# Altium PCB PCB_v1.PcbDoc
Units mm, origin at the board's own origin, x right, y up, seen from the top; angles counter-clockwise.
Board outline 35 x 35 mm, 4 copper layers (Top Layer, Signal Layer 1, Signal Layer 2, Bottom Layer), stack 1.09 mm thick; 73 components, 83 nets, 323 pads, 394 vias.
Unrouted connection lines stored in the file: 8.
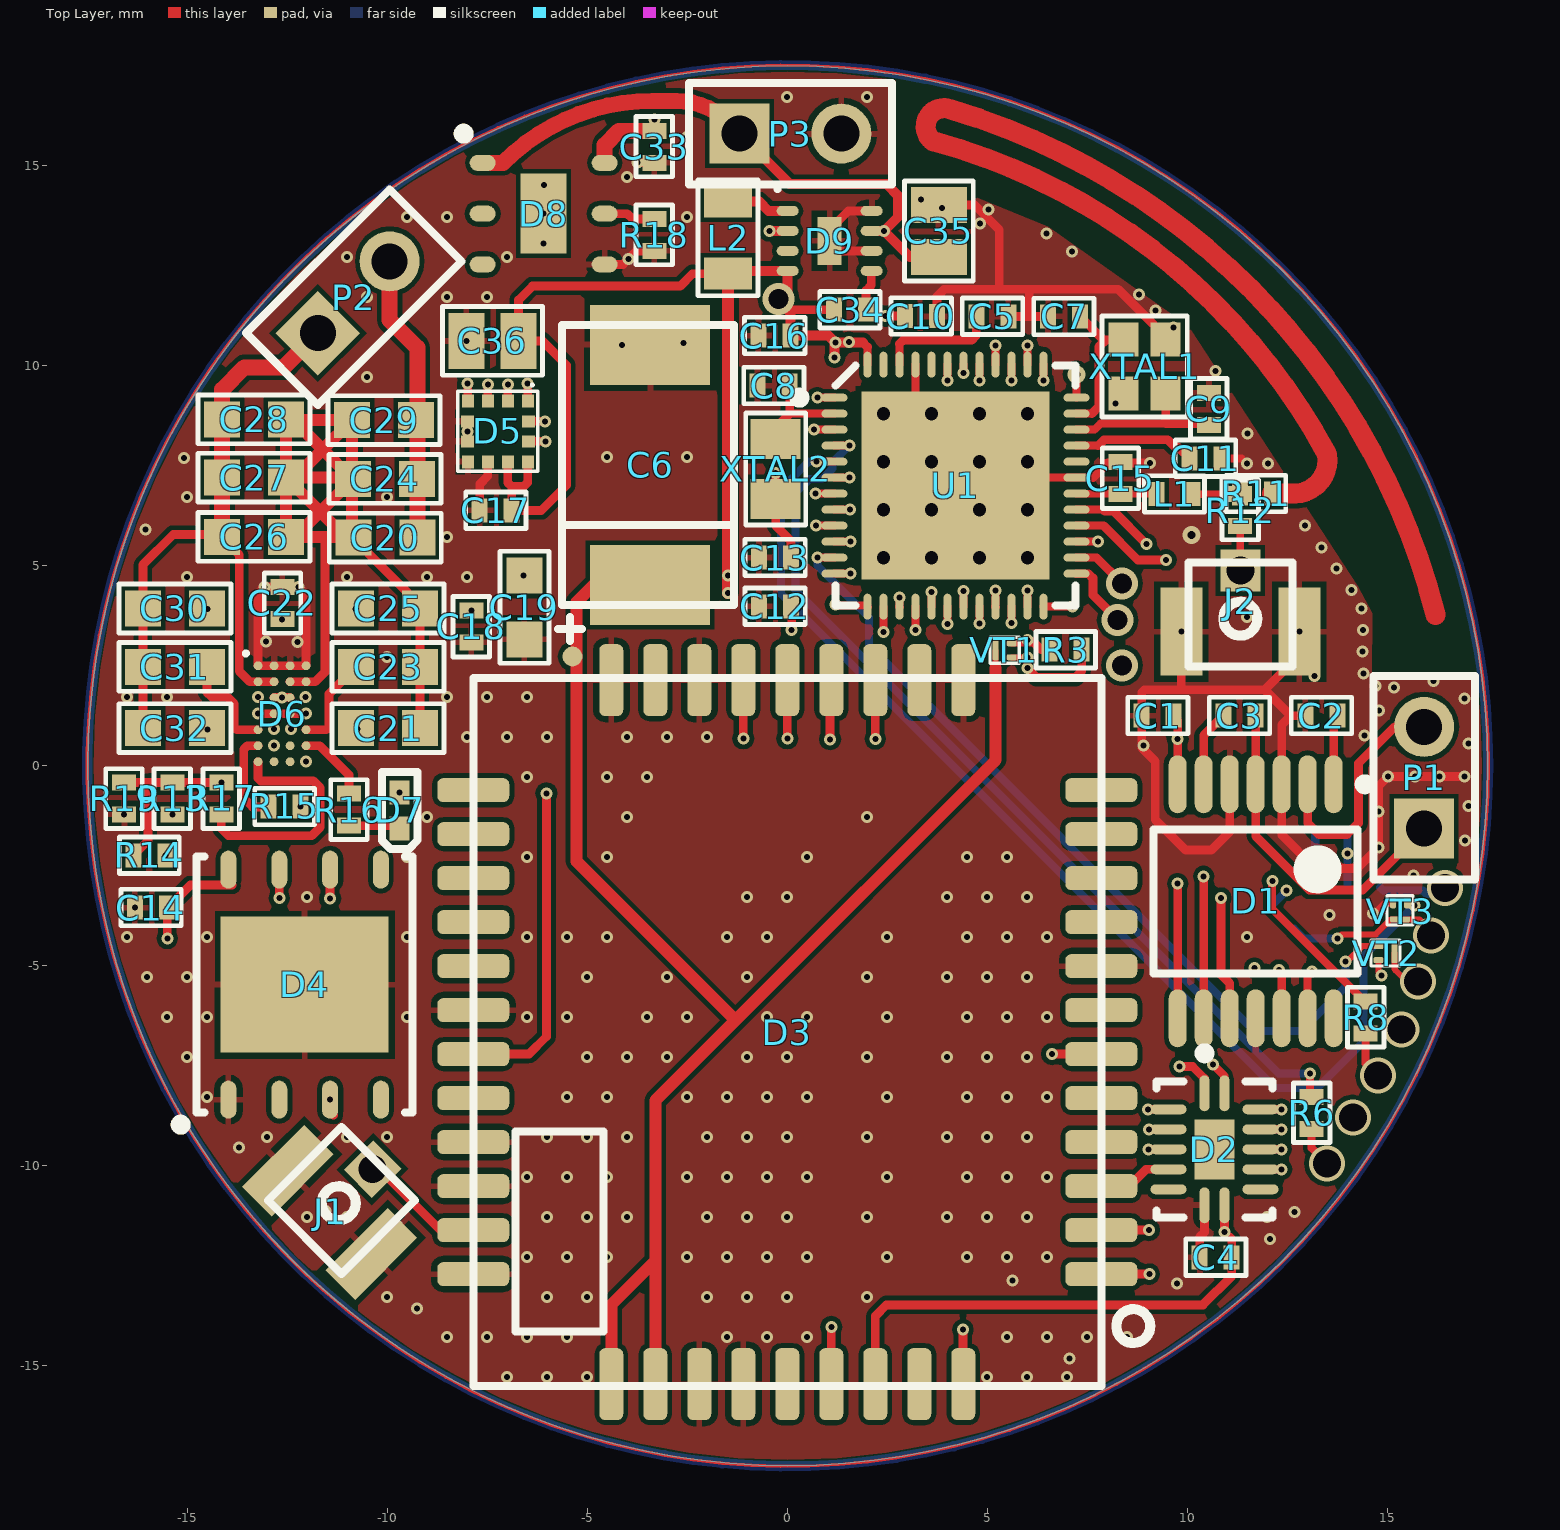
[diagram p0: Top Layer view]
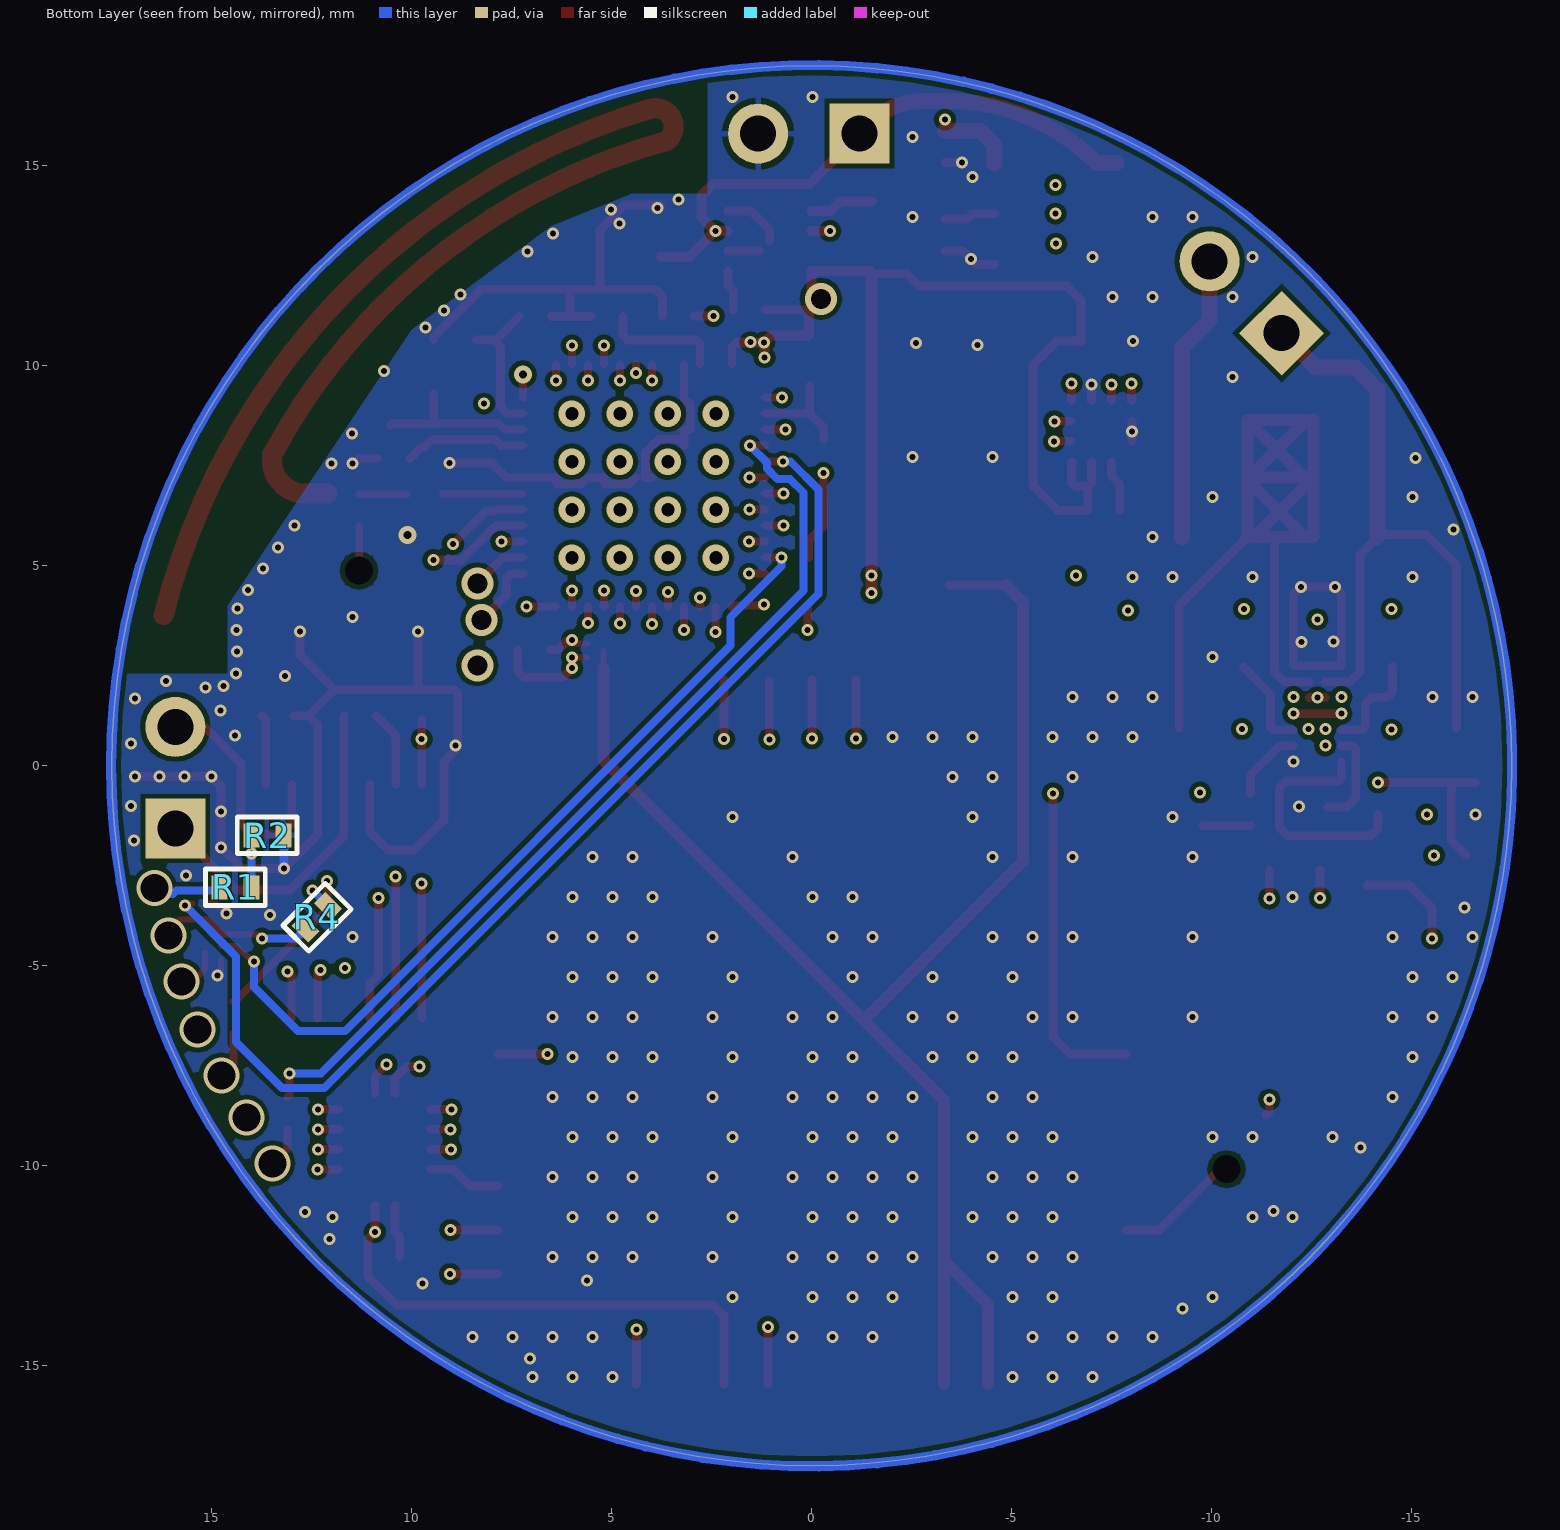
[diagram p1: Bottom Layer view, seen from below]
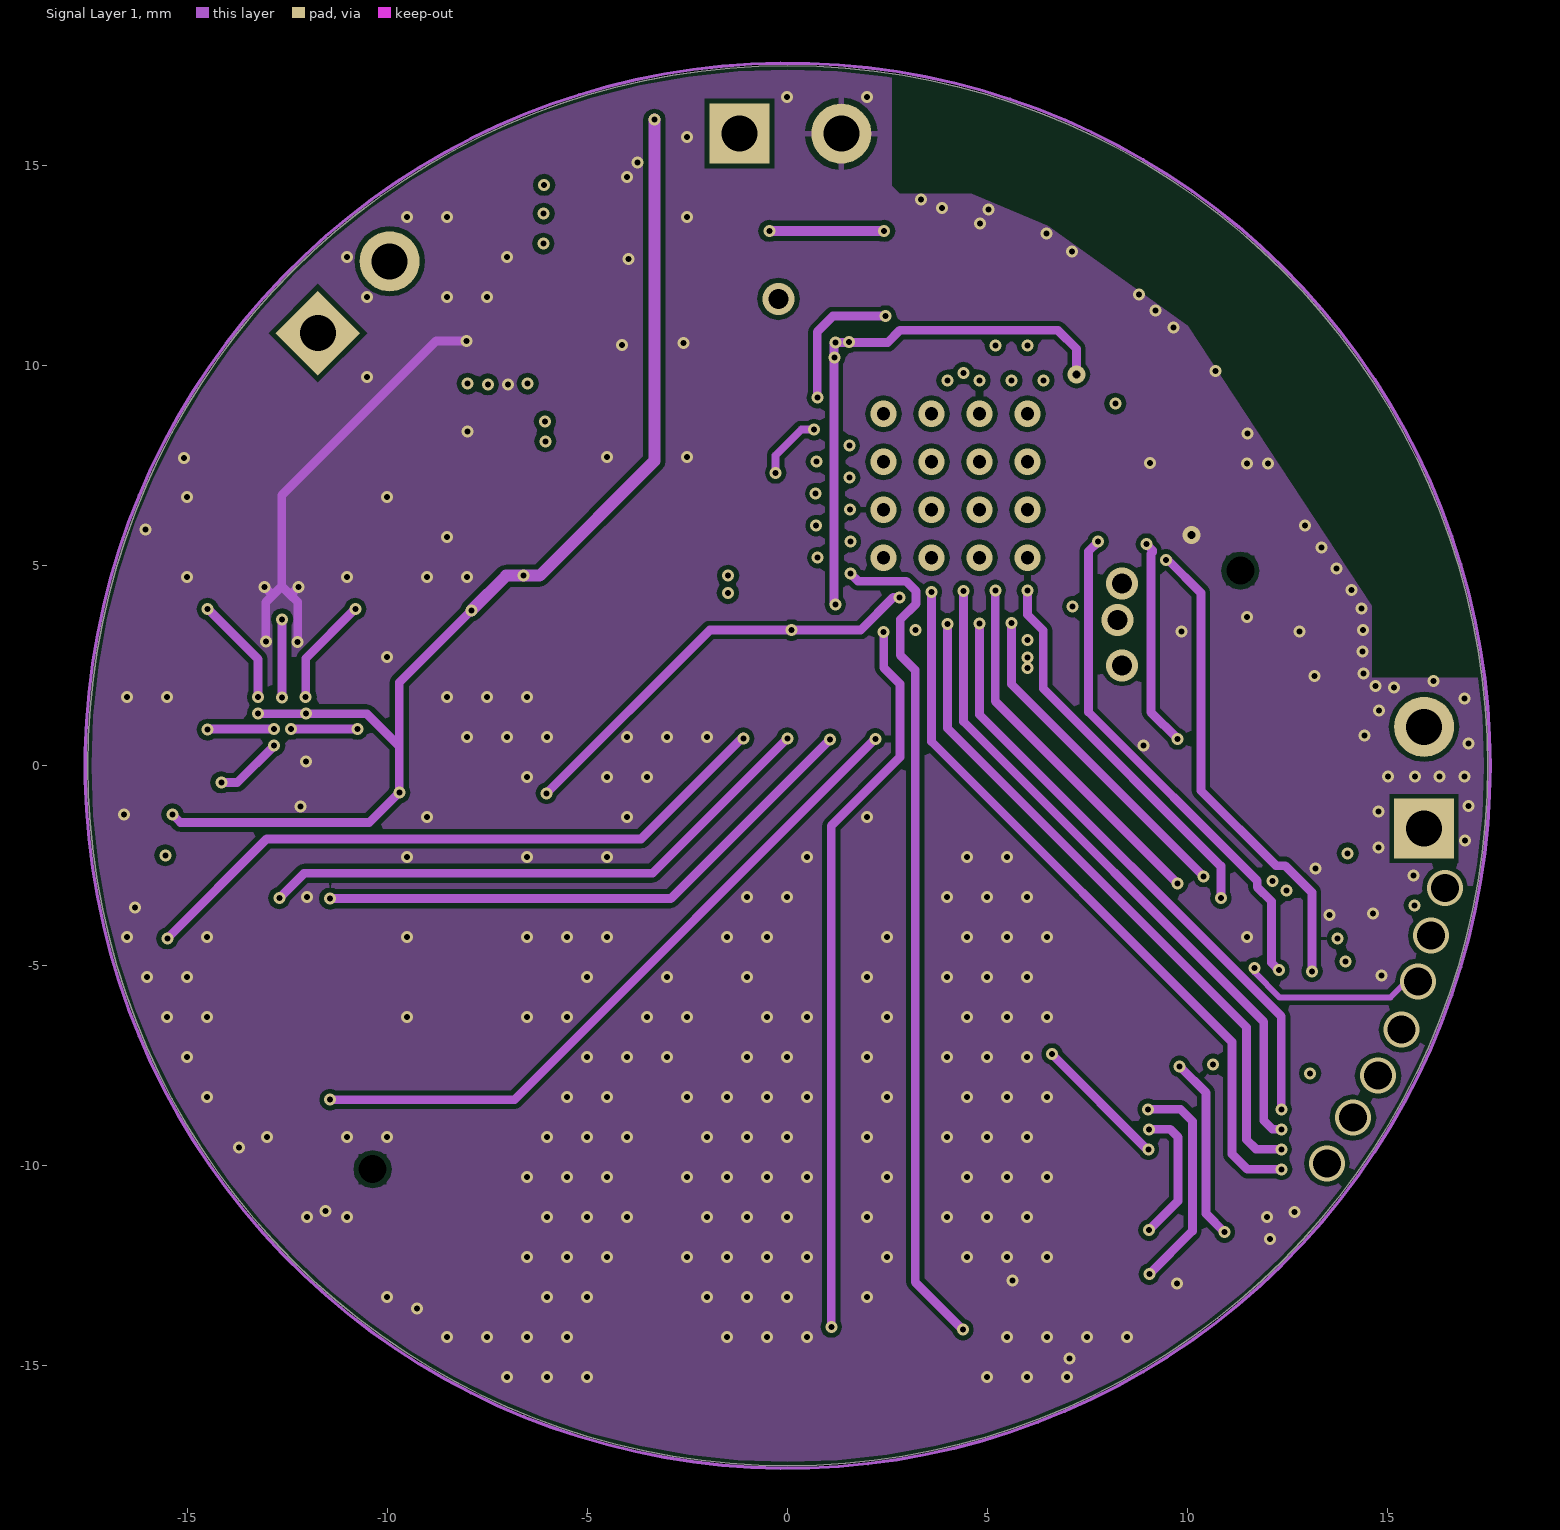
[diagram p2: Signal Layer 1]
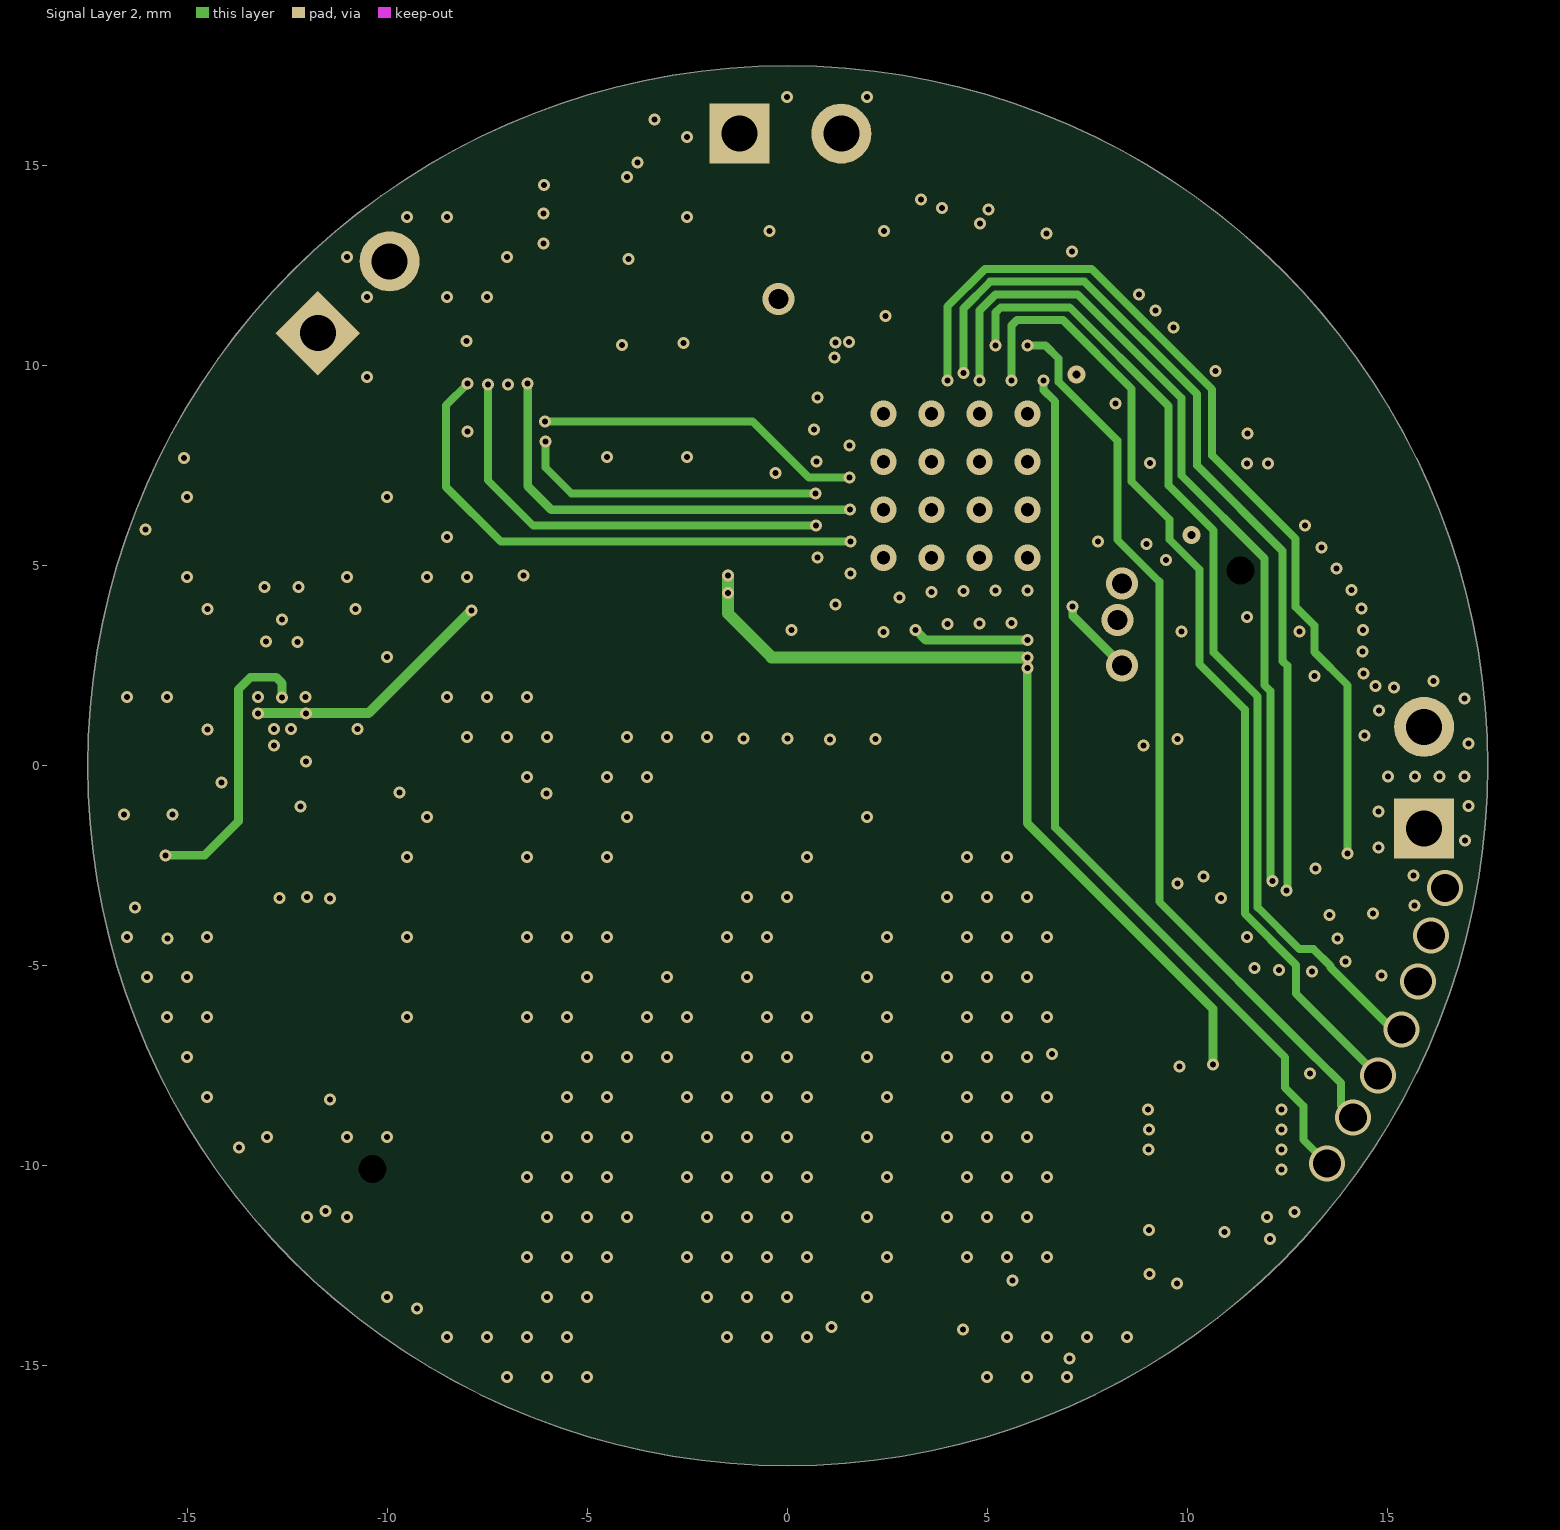
[diagram p3: Signal Layer 2]

## Layer stack, top to bottom
Top Solder: solder mask 0.0102, Solder Resist, Dk 3.5
Top Layer: signal copper 0.035
Dielectric 1: core 0.11, FR-4, Dk 4.2
Signal Layer 1: signal copper 0.035
Dielectric 3: prepreg 0.73, Dk 4.2
Signal Layer 2: signal copper 0.035
Dielectric 2: core 0.11, Dk 4.2
Bottom Layer: signal copper 0.035
Bottom Solder: solder mask 0.0102, Solder Resist, Dk 3.5

## Board outline
0,-17.5 cw(c0,0) -17.5,0 cw(c0,0) 0,17.5 cw(c0,0) 17.5,0 cw(c0,0)

## Design rules (kind name [scope] priority, off if disabled: settings)
Clearance [All] p1: gap=0.12 ignorepadtopadclearanceinfootprint=FALSE except(0: Arc-Hole Track-Hole SMDPad-Hole THPad-Hole Via-Hole Fill-Hole Poly-Hole Region-Hole Text-Hole)
PolygonConnect [(ObjectKind = 'Via') And (Net = 'GND')] p1: connectstyle=Direct reliefconductorwidth=0.254 reliefentries=4 polygonreliefangle="90 Angle" airgapwidth=0.254
PolygonConnect PolygonConnect_1 [All] p2: connectstyle=Relief reliefconductorwidth=0.15 reliefentries=4 polygonreliefangle="90 Angle" airgapwidth=0.15
RoutingVias [All] p1: holewidth=0.15 width=0.3 viastyle="Through Hole" minholewidth=0.15 minwidth=0.3 maxholewidth=0.15 maxwidth=0.3
SolderMaskExpansion [All] p1: expansion=0.102
Width [All] p1: maxlimit=0.5 minlimit=0.08 preferedwidth=0.2
30 further rules are at their usual default settings.

## Components (designator, comment, footprint, x,y, rotation, side; value= is the part's Value field where it differs from the comment)
C1 "100n" C0402 9.25,1.25 r0 top
C2 "100n" C0402 13.34,1.25 r0 top
C3 "C" C0402 11.29,1.25 r0 top
C4 "100n" C0402 10.7,-12.29 r0 top
C5 "1u" C0402 5.116,11.23 r0 top
C6 "C_TANTAL" C_TYPE_D -3.44,7.52 r90 top
C7 "12p" C0402 6.91,11.23 r180 top
C8 "12p" C0402 -0.35,9.5 r0 top
C9 "12p" C0402 10.53,8.92 r90 top
C10 "100n" C0402 3.332,11.24 r0 top
C11 "100p" C0402 10.44,7.68 r0 top
C12 "100n" C0402 -0.32,3.985 r0 top
C13 "12p" C0402 -0.32,5.2 r0 top
C14 "100n" C0402 -15.92,-3.55 r0 top
C15 "0.8p" C0402 8.32,7.19 r270 top
C16 "100n" C0402 -0.33,10.75 r0 top
C17 "100n" C0402 -7.3,6.38 r0 top
C18 "100n" C0402 -7.91,3.48 r270 top
C19 "10u" C0603 -6.58,3.96 r90 top
C20 "NF" C0603 -10.06,5.7 r0 top
C21 "47n" C0603 -9.99,0.94 r180 top
C22 "10u" C0402 -12.63,4.07 r270 top
C23 "47n" C0603 -9.99,2.47 r180 top
C24 "NF" C0603 -10.07,7.17 r0 top
C25 "10n" C0603 -9.99,3.93 r180 top
C26 "NF" C0603 -13.34,5.72 r0 top
C27 "NF" C0603 -13.34,7.2 r0 top
C28 "NF" C0603 -13.34,8.66 r0 top
C29 "NF" C0603 -10.09,8.64 r0 top
C30 "10n" C0603 -15.32,3.93 r0 top
C31 "47n" C0603 -15.32,2.47 r0 top
C32 "47n" C0603 -15.32,0.94 r0 top
C33 "C" C0402 -3.33,15.47 r90 top
C34 "560p" C0402 1.56,11.4 r180 top
C35 "4.7u" C0805 3.78,14.02 r270 top
C36 "4.7u" C0805 -8.03,10.62 r0 top
D1 "ZSSC3122" TSSOP14 11.7,-3.39 r270 top
D2 "NTS0104BQ-Q100X" DHVQFN14 10.67,-9.59 r0 top
D3 "SIM7020E" SIM7020E 7.84,-12.71 r180 top
D4 "eSim" VQFN8 -12.075,-5.475 r0 top
D5 "IIS2DH" LGA12 -6.498,9.122 r270 top
D6 "BQ51003" DSBGA -12.64,1.3 r0 top
D7 "Led" D0402(1006) -9.7,-1.57 r90 top
D8 "STBC08" DFN6 -6.1,13.8 r0 top
D9 "MIC23050-SYML" MLF8 1.05,13.12 r0 top
J1 "Connector(U.FL)" U.FL -10.375,-10.089 r315 top
J2 "Connector(U.FL)" U.FL 11.315,4.875 r0 top
L1 "3.9n" L0402 9.62,6.79 r0 top
L2 "lqm21pn1r0mc0d" L0805 -1.49,14.1 r270 top
P1 "C" HDR1X2 15.91,-1.57 r90 top
P2 "COIL" HDR1X2 -11.746,10.814 r45 top
P3 "BAT" HDR1X2 -1.2,15.8 r0 top
R1 "R" R0402 14.41,-3.04 r0 bottom
R2 "R" R0402 13.61,-1.74 r180 bottom
R3 "100k" R0402 6.95,2.9 r180 top
R4 "R" R0402 12.37,-3.79 r315 bottom
R6 "R" R0402 13.1,-8.68 r270 top
R8 "R" R0402 14.45,-6.29 r270 top
R11 "0" R0402 11.71,6.8 r0 top
R12 "0" R0402 11.31,6.39 r270 top
R13 "NF" R0402 -15.38,-0.82 r90 top
R14 "20k" R0402 -15.96,-2.24 r180 top
R15 "10k" R0402 -12.58,-1.02 r180 top
R16 "620" R0402 -10.97,-1.1 r270 top
R17 "620" R0402 -14.16,-0.82 r90 top
R18 "20k" R0402 -3.33,13.27 r90 top
R19 "R" R0402 -16.59,-0.82 r90 top
U1 "nRF52811-QFAA" QFN40P600X600X90-48N 4.195,7 r0 top
VT1 "CSD23280F3" CSD13380F3#1 5.6,2.71 r180 top
VT2 "CSD13380F3" CSD13380F3#2 14.77,-4.51 r0 top
VT3 "CSD13380F3" CSD13380F3#2 15.485,-3.44 r270 top
XTAL1 "XTAL" NX2016SA 8.4,9.3 r90 top
XTAL2 "32.768 kHz" NX2012SA -0.3,6.67 r90 top

## Footprints (in the part's own frame and the unit in brackets; to place one, negate y for a bottom-side part, rotate by r counter-clockwise, add the part's x,y. Pads: shape width x height; smd on the part's side, far side on the other; paste and mask are expansions set on the pad)
C0402 [mm]
  rect 0.4x0.6 smd: 1(-0.4,0) 2(0.4,0)
  silkscreen extent -0.75,-0.45 0.76,0.46
C0603 [mm]
  rect 0.9x0.9 smd: 1(-0.8,0) 2(0.8,0)
  silkscreen extent -1.4,-0.61 1.4,0.61
C0805 [mm]
  rect 0.9x1.4 smd: 1(0,0) 2(1.3,0)
  silkscreen extent -0.6,-0.86 1.9,0.86
C_TYPE_D [mm]
  rect 2x3 smd: 1(-3,0) 2(3,0)
  silkscreen extent -4.4,-2.1 3.5,2.3
CSD13380F3#1 [mm]
  rrect50% 0.15x0.5 smd: D(0.4,-0.175)
  rrect50% 0.25x0.15 smd: G(0,-0.35) S(0,0)
  silkscreen extent -0.19,-0.5 0.54,0.15
CSD13380F3#2 [mm]
  rrect50% 0.15x0.5 smd: D(0.4,-0.175)
  rrect50% 0.25x0.15 smd: G(0,0) S(0,-0.35)
  silkscreen extent -0.19,-0.5 0.54,0.15
D0402(1006) [mm]
  rect 0.6x0.5 smd: 1(0,0) 2(0.9,0)
  silkscreen extent -0.51,-0.45 1.41,0.44
DFN6 [mm]
  oval 0.65x0.4 smd: 1(-1.525,1.27) 2(-1.525,0) 3(-1.525,-1.27) 4(1.525,-1.27) 5(1.525,0) 6(1.525,1.27)
  rect 1.15x2 smd: 7(0,0)
  silkscreen extent -2.12,1.88 -1.88,2.12, body extent -1.55,-1.55 1.55,1.55, height 1
DHVQFN14 [mm] "QFN, 14-Leads, Body 2,50x3,00mm, Pitch 0,50mm, Thermal Pad 1,00x1,50mm, IPC Medium Density"
  oval 0.25x0.9 smd: 1(-0.25,1.4) 7(-0.25,-1.4) 8(0.25,-1.4) 14(0.25,1.4)
  oval 0.9x0.25 smd: 2(-1.15,1) 3(-1.15,0.5) 4(-1.15,0) 5(-1.15,-0.5) 6(-1.15,-1) 9(1.15,-1) 10(1.15,-0.5) 11(1.15,0) 12(1.15,0.5) 13(1.15,1)
  rect 1x1.5 smd: 15(0,0)
  silkscreen extent -1.45,-1.7 1.45,2.52, body extent -1.3,-1.55 1.3,1.55, height 1
DSBGA [mm] "DSBGA"
  round 0.22 smd: AC1(0.2,0.8) AC1(0.6,0.8) AC2(-0.6,0.8) AC2(-0.2,0.8) AD(0.6,-1.2) AD-EN(0.2,-0.8) BOOT1(0.6,0.4) BOOT2(-0.6,0.4) CHG(0.6,-0.8) CLAMP1(0.2,-0.4) CLAMP2(-0.2,-0.4) COMM1(0.6,-0.4) COMM2(-0.6,-0.4) EN1(0.2,-1.2) EN2(-0.2,-1.2) FOD(-0.2,-0.8) ILIM(-0.6,-1.2) OUT(-0.6,0) OUT(-0.2,0) OUT(0.2,0) OUT(0.6,0) PGND(-0.6,1.2) PGND(-0.2,1.2) PGND(0.2,1.2) PGND(0.6,1.2) RECT(-0.2,0.4) RECT(0.2,0.4) TS-CTRL(-0.6,-0.8)
  silkscreen extent -0.95,1.46 -0.85,1.55, body extent -0.8,-1.4 0.8,1.4, height 0.3
HDR1X2 [mm] "Connector; Header; 2 Position"
  rect 1.5x1.5 hole 0.9: 1(0,0)
  round 1.5 hole 0.9: 2(2.54,0)
  silkscreen extent -1.27,-1.27 3.81,1.27
L0402 [mm]
  rect 0.4x0.6 smd: 1(-0.4,0) 2(0.5,0)
  silkscreen extent -0.7,-0.45 0.8,0.46
L0805 [mm]
  rect 0.8x1.2 smd: 1(0,0) 2(1.8,0)
  silkscreen extent -0.55,-0.75 2.35,0.75
LGA12 [mm]
  rect 0.325x0.3 smd: 1(0,0) 2(0,-0.5) 3(0,-1) 4(0,-1.5) 7(1.525,-1.5) 8(1.525,-1) 9(1.525,-0.5) 10(1.525,0)
  rect 0.3x0.325 smd: 5(0.513,-1.512) 6(1.012,-1.512) 11(1.012,0.012) 12(0.513,0.012)
  silkscreen extent -0.41,-1.75 1.76,0.25
MLF8 [mm]
  oval 0.55x0.25 smd: 1(-1.05,0.75) 2(-1.05,0.25) 3(-1.05,-0.25) 4(-1.05,-0.75) 5(1.05,-0.75) 6(1.05,-0.25) 7(1.05,0.25) 8(1.05,0.75)
  rect 0.6x1.2 smd: 9(0,0)
  silkscreen extent -1.35,1.25 -1.25,1.35, body extent -1,-1 1,1, height 0.85
NX2012SA [mm]
  rect 1x1.25 smd: 1(0,0) 2(1.5,0)
  silkscreen extent -0.65,-0.75 2.15,0.75
NX2016SA [mm]
  rect 0.85x0.75 smd: 1(0,-1.05) 2(1.35,0) GND(0,0) GND(1.35,-1.05)
  silkscreen extent -0.58,-1.59 1.94,0.54
QFN40P600X600X90-48N [mm]
  oval 0.65x0.2 smd: 1(-3.025,2.2) 2(-3.025,1.8) 3(-3.025,1.4) 4(-3.025,1) 5(-3.025,0.6) 6(-3.025,0.2) 7(-3.025,-0.2) 8(-3.025,-0.6) 9(-3.025,-1) 10(-3.025,-1.4) 11(-3.025,-1.8) 12(-3.025,-2.2) 25(3.025,-2.2) 26(3.025,-1.8) 27(3.025,-1.4) 28(3.025,-1) 29(3.025,-0.6) 30(3.025,-0.2) 31(3.025,0.2) 32(3.025,0.6) 33(3.025,1) 34(3.025,1.4) 35(3.025,1.8) 36(3.025,2.2)
  oval 0.2x0.65 smd: 13(-2.2,-3.025) 14(-1.8,-3.025) 15(-1.4,-3.025) 16(-1,-3.025) 17(-0.6,-3.025) 18(-0.2,-3.025) 19(0.2,-3.025) 20(0.6,-3.025) 21(1,-3.025) 22(1.4,-3.025) 23(1.8,-3.025) 24(2.2,-3.025) 37(2.2,3.025) 38(1.8,3.025) 39(1.4,3.025) 40(1,3.025) 41(0.6,3.025) 42(0.2,3.025) 43(-0.2,3.025) 44(-0.6,3.025) 45(-1,3.025) 46(-1.4,3.025) 47(-1.8,3.025) 48(-2.2,3.025)
  rect 4.7x4.7 smd: 49(0,0)
  silkscreen extent -4.02,-3 3,3, body extent -3.02,-3.02 3.02,3.02, height 0.86
R0402 [mm]
  rect 0.4x0.6 smd: 1(-0.4,0) 2(0.4,0)
  silkscreen extent -0.75,-0.45 0.74,0.46
SIM7020E [mm]
  rrect50% 1.8x0.6 smd: 1(0,0) 2(0,-1.1) 3(0,-2.2) 4(0,-3.3) 5(0,-4.4) 6(0,-5.5) 7(0,-6.6) 8(0,-7.7) 9(0,-8.8) 10(0,-9.9) 11(0,-11) 12(0,-12.1) 22(15.7,-12.1) 23(15.7,-11) 24(15.7,-9.9) 25(15.7,-8.8) 26(15.7,-7.7) 27(15.7,-6.6) 28(15.7,-5.5) 29(15.7,-4.4) 30(15.7,-3.3) 31(15.7,-2.2) 32(15.7,-1.1) 33(15.7,0)
  rrect50% 0.6x1.8 smd: 13(3.45,-14.85) 14(4.55,-14.85) 15(5.65,-14.85) 16(6.75,-14.85) 17(7.85,-14.85) 18(8.95,-14.85) 19(10.05,-14.85) 20(11.15,-14.85) 21(12.25,-14.85) 34(12.25,2.75) 35(11.15,2.75) 36(10.05,2.75) 37(8.95,2.75) 38(7.85,2.75) 39(6.75,2.75) 40(5.65,2.75) 41(4.55,2.75) 42(3.45,2.75)
  silkscreen extent -1.22,-14.9 15.7,2.8
TSSOP14 [mm] "TSSOP14"
  oval 1.45x0.45 smd: 1(-2.925,1.95) 2(-2.925,1.3) 3(-2.925,0.65) 4(-2.925,0) 5(-2.925,-0.65) 6(-2.925,-1.3) 7(-2.925,-1.95) 8(2.925,-1.95) 9(2.925,-1.3) 10(2.925,-0.65) 11(2.925,0) 12(2.925,0.65) 13(2.925,1.3) 14(2.925,1.95)
  silkscreen extent -3.05,-2.55 1.8,2.85, body extent -2.2,-2.55 2.2,2.55, height 1.1
U.FL [mm]
  rect 1x1.05 smd: 1(0,0)
  rect 1.05x2.2 smd: 2(-1.475,-1.525) 2(1.475,-1.525)
  silkscreen extent -1.3,-2.4 1.3,0.2
VQFN8 [mm] "VQFN8"
  oval 0.4x0.95 smd: 1(-1.905,-2.875) 2(-0.635,-2.875) 3(0.635,-2.875) 4(1.905,-2.875) 5(1.905,2.875) 6(0.635,2.875) 7(-0.635,2.875) 8(-1.905,2.875)
  rect 4.2x3.4 smd: 9(0,0)
  silkscreen extent -3.22,-3.62 2.7,3.2, body extent -2.55,-3.05 2.55,3.05, height 0.9

## Part data
C1 C2 C4 C5 C7 C8 C9 C10 C11 C12 C13 C14 C15 C16 C17 C18 C19 C20 C21 C22 C23 C24 C25 C26 C27 C28 C29 C30 C31 C32 C34 C35 C36: library part C
D2: library part NTS0304
L1 L2: library part L
P1 P2 P3: library part "Header 2", "Header, 2-Pin"
R3 R11 R12 R13 R14 R15 R16 R17 R18: library part R
U1: "Multi-protocol Bluetooth Low Energy, IEEE 802.15.4, ANT and 2.4GHz proprietary system-on-chip"

## Free pads (board coordinates)
  rect 0.45x0.5 hole 0.7: 1(-10.375,-10.089) 2(11.315,4.875)
  round 0.5 smd: 3(-5.38,2.73)

## Via types
v1: diameter 0.3, hole 0.15, Top Layer to Bottom Layer, tented both sides, 365 vias
v2: diameter 0.66, hole 0.33, Top Layer to Bottom Layer, 16 vias
v3: diameter 0.9, hole 0.7, Top Layer to Bottom Layer, 7 vias
v4: diameter 0.8, hole 0.5, Top Layer to Bottom Layer, 3 vias
v5: diameter 0.45, hole 0.2, Top Layer to Bottom Layer, tented both sides, 2 vias
v6: diameter 0.8, hole 0.5, Top Layer to Bottom Layer, tented both sides, 1 vias

## Nets (pads, with @x,y where several pads share a name; then routed paths per layer and width w, separated by ;. In a path a pad name is that pad's centre, name@x,y a point inside that pad or via, vN(x,y) a via of type N, cw(c..) or ccw(c..) an arc to the next point about the centre after c; other vN are vias at no path point)
3V3: C16.2 C17.2 C34.2 C36.2 D2.14 D5.9 D5.10 D9.4 L2.2 R3.1 U1.13 U1.36 U1.48 VT1.S | length 69.3
  Top Layer w0.15: VT1.S v1(5.99,2.71)
  Top Layer w0.2: v1@1.22,4 U1.13@1.97,4 ; U1.48 1.995,10.465 ; U1.36 v5(7.22,9.78) ; v1(10.63,-7.47) 10.92,-7.76 D2.14
  Top Layer w0.22: D5.9 -6.998,7.078 -6.9,6.98 ; D5.10@-6.53,7.565 D5.10 -6.498,7.082 -6.6,6.98 -6.9,6.98 ; L2.2 -2.38,12.3 -2.69,11.99 -6.38,11.99 -6.73,11.64 C36.2 -6.14,10.62 -5.53,10.01 -5.53,7.01 -6.16,6.38 C17.2 -6.9,6.98 ; v6@0,11.4 C34.2 ; v1@1.176,10.58 v1(1.19,10.58) ; 1.88,10.58 1.995,10.465 ; U1.13@1.97,4 U1.13 ; v1(5.99,2.71) v1(5.99,2.44) 6.22,2.21 7.2,2.21 7.35,2.36 R3.1
  Top Layer w0.25: L2.2@-1.48,12.37 D9.4@-0.06,12.37 ; D9.4 0,11.4 0.07,11.33 C16.2 1.02,10.75 v1(1.19,10.58) 1.88,10.58 ; v1(1.176,10.209) v1@1.176,10.58
  Top Layer w0.3: v1@-1.49,4.318 v1(-1.49,4.75) L2.2
  Signal Layer 1 w0.22: v1(1.19,4.03) 1.16,4.06 1.16,10.55 v1(1.19,10.58) 2.498,10.58 2.803,10.885 6.755,10.885 7.22,10.42 v5(7.22,9.78)
  Signal Layer 2 w0.22: v1(5.99,2.71) v1(5.99,2.44) 5.99,-1.44 10.63,-6.08 v1(10.63,-7.47)
  Signal Layer 2 w0.3: v1(-1.49,4.75) -1.49,3.8 -0.4,2.71 v1@5.87,2.71
  other v1: -1.494,4.314 1.533,10.587
  other v6: -0.23,11.67
5V: C18.1 C19.2 C33.2 D6.OUT D7.2 D8.6 R13.1 | length 39.6
  Top Layer w0.22: v1(-13.24,1.3) -12.84,1.3 -12.44,1.3 v1(-12.04,1.3) ; C33.2 v1(-3.33,16.15)
  Top Layer w0.4: D8.6 -4.575,15.515 -4.22,15.87 C33.2
  Signal Layer 1 w0.22: v1(-15.38,-1.22) -15.18,-1.42 -10.46,-1.42 v1(-9.71,-0.67) -9.71,0.49 ; v1(-13.24,1.3) v1(-12.04,1.3) -10.52,1.3 -9.71,0.49 ; v1(-7.91,3.88) -9.71,2.08 -9.71,0.49
  Signal Layer 1 w0.3: v1(-7.91,3.88) -7.04,4.75 v1(-6.61,4.75) -6.2,4.75 -3.33,7.62 v1(-3.33,16.15)
  Signal Layer 2 w0.25: v1(-13.24,1.3) -13.225,1.315 -12.055,1.315 v1(-12.04,1.3) -12.025,1.315 -10.475,1.315 v1(-7.91,3.88)
ACC_INT1: D5.12 U1.6 | length 9
  Top Layer w0.2: U1.6 v1(1.55,7.2)
  Top Layer w0.22: D5.12 v1(-6.07,8.61)
  Signal Layer 2 w0.2: v1(-6.07,8.61) -0.88,8.61 0.53,7.2 v1(1.55,7.2)
ACC_INT2: D5.11 U1.7 | length 8.6
  Top Layer w0.2: v1(0.7,6.8) U1.7
  Top Layer w0.22: D5.11 v1(-6.06,8.11)
  Signal Layer 2 w0.2: v1(-6.06,8.11) -6.06,7.46 -5.4,6.8 v1(0.7,6.8)
ACC_MISO: D5.3 U1.9 | length 11.9
  Top Layer w0.2: v1(0.71,6) U1.9
  Top Layer w0.22: D5.3 v1(-7.498,9.533)
  Signal Layer 2 w0.2: v1(-7.498,9.533) -7.498,7.138 -6.36,6 v1(0.71,6)
ACC_MOSI: D5.4 U1.10 | length 14.3
  Top Layer w0.2: U1.10 v1(1.57,5.6)
  Top Layer w0.22: v1(-8,9.55) -7.997,9.548 D5.4
  Signal Layer 2 w0.2: v1(-8,9.55) -8.54,9.01 -8.54,6.97 -7.17,5.6 v1(1.57,5.6)
ACC_SCL: D5.1 U1.8 | length 11.7
  Top Layer w0.2: U1.8 v1(1.56,6.4)
  Top Layer w0.22: v1(-6.5,9.55) -6.498,9.548 D5.1
  Signal Layer 2 w0.22: v1(-6.5,9.55) -6.5,6.99 -5.91,6.4 v1(1.56,6.4)
AIN0: R6.1 U1.4 | length 23.2
  Top Layer w0.2: U1.4 v1(1.54,8) ; v1(13.06,-7.69) 13.06,-8.24 R6.1
  Bottom Layer w0.2: v1(1.54,8) 1.12,7.58 1.12,7.43 0.86,7.17 0.547,7.17 0.2,6.823 0.2,4.38 12.27,-7.69 v1(13.06,-7.69)
AIN1: U1.5 VT3.G | length 28.5
  Top Layer w0.15: VT3.G v1@15.62,-3.44
  Top Layer w0.2: v1(0.72,7.6) U1.5
  Bottom Layer w0.2: v1(0.72,7.6) 0.524,7.6 -0.17,6.906 -0.17,4.297 12.187,-8.06 13.24,-8.06 14.39,-6.91 14.39,-4.77 v1(15.67,-3.49)
AIN5: R8.1 U1.41 | length 25.5
  Top Layer w0.2: v1(4.795,9.625) U1.41 ; v1(12.12,-2.88) 12.104,-2.896 12.104,-3.578 14.417,-5.89 R8.1
  Signal Layer 2 w0.2: v1(4.795,9.625) 4.795,11.38 5.195,11.78 7.25,11.78 9.84,9.19 9.84,7.26 11.92,5.18 11.92,2.013 12.07,1.863 12.07,-2.83 v1(12.12,-2.88)
AIN6: R4.1 U1.42 | length 23
  Top Layer w0.2: v1(4.395,9.819) U1.42
  Signal Layer 1 w0.2: v1@4.395,9.805 v1(4.395,9.819)
  Signal Layer 2 w0.2: v1@4.395,9.825 4.395,11.432 5.063,12.1 7.42,12.1 10.23,9.29 10.23,7.51 12.37,5.37 12.37,2.62 12.49,2.5 v1@12.49,-3.12
  Bottom Layer w0.2: R4.1 v1(12.474,-3.12)
AIN7: R1.1 R2.1 U1.43 | length 24.8
  Top Layer w0.2: v1(3.995,9.625) U1.43
  Signal Layer 2 w0.2: v1(3.995,9.625) 3.995,11.485 4.93,12.42 7.6,12.42 10.61,9.41 10.61,7.76 12.7,5.67 12.7,3.97 13.17,3.5 13.17,2.84 14,2.01 v1(14,-2.19)
  Bottom Layer w0.2: R1.1 14,-3.03 v1(14,-2.19) 14,-1.75 R2.1
ANT_2G4: R11.2 | length 34.5
  Top Layer w0.5: 3.61,15.63 cw(c3.909,15.979) 4.07,16.41 cw(c-1.006,-0.596) 16.198,3.761 ; 3.65,15.61 cw(c-0.572,0.216) 13.487,7.774 cw(c12.654,7.643) 12.698,6.8 R11.2
CAP_ALARM_H: D1.9 U1.22 | length 12.3
  Top Layer w0.2: v1(5.595,3.565) U1.22
  Top Layer w0.22: D1.9 v1(10.4,-2.77)
  Signal Layer 1 w0.22: v1(5.595,3.565) 5.595,2.035 v1(10.4,-2.77)
CAP_ALARM_L: D1.8 U1.21 | length 13
  Top Layer w0.2: U1.21@5.19,3.98 v1(5.19,4.38)
  Top Layer w0.22: U1.21@5.19,3.98 U1.21 ; D1.8 v1(9.75,-2.95)
  Signal Layer 1 w0.22: v1(5.19,4.38) 5.19,1.61 v1(9.75,-2.95)
CAP_PWR: C1.2 D1.7 U1.29 | length 8.9
  Top Layer w0.2: U1.29 7.885,6.4
  Top Layer w0.22: 7.885,6.4 7.925,6.36 8.148,6.36 v1(8.967,5.541) ; D1.7 v1(9.75,0.67) C1.2@9.75,1.15
  Signal Layer 1 w0.22: v1(8.967,5.541) 9.12,5.388 9.12,5.34 9.08,5.3 9.08,1.34 v1(9.75,0.67)
CAP_READY: D1.10 U1.23 | length 13.2
  Top Layer w0.2: U1.23 v1(5.995,4.375)
  Top Layer w0.22: v1(10.83,-3.31) 10.83,-5.22 11.05,-5.44 D1.10
  Signal Layer 1 w0.22: v1(5.995,4.375) 5.995,3.775 6.39,3.38 6.39,1.93 10.83,-2.51 v1(10.83,-3.31)
CAP_SCLK: D1.13 U1.28 | length 15.8
  Top Layer w0.2: U1.28 7.897,6 ; D1.13 13,-5.25 v1(13.11,-5.14)
  Top Layer w0.22: 7.897,6 8.754,5.143 v1(9.46,5.143)
  Signal Layer 1 w0.22: v1(9.46,5.143) 9.507,5.143 10.33,4.32 10.33,-0.62 12.21,-2.5 12.437,-2.5 13.11,-3.173 v1(13.11,-5.14)
CAP_SDA: D1.12 U1.27 | length 14.6
  Top Layer w0.2: U1.27 v1(7.76,5.6)
  Top Layer w0.22: v1(12.28,-5.11) 12.35,-5.18 D1.12
  Signal Layer 1 w0.22: v1(7.76,5.6) 7.52,5.36 7.52,1.343 11.74,-2.877 11.74,-3.037 12.094,-3.392 12.094,-4.924 v1(12.28,-5.11)
GND: C1.1 C2.1 C4.1 C5.2 C6.2 C7.2 C8.1 C9.2 C10.2 C11.2 C12.1 C13.1 C14.1 C15.1 C16.1 C17.1 C18.2 C19.1 C22.1 C33.1 C35.1 C36.1 D1.3 D1.5 D1.11 D2.7 D3.8 D3.13 D3.19 D3.21 D3.27 D3.30 D3.31 D3.33 D3.36 D3.37 D4.1 D4.9 D5.2 D5.5 D5.6 D5.7 D5.8 D6.AD D6.PGND D8.4 D9.6 D9.8 D9.9 J1.2 J2.2 P3.2 R2.2 R15.1 R18.1 R19.1 U1.31 U1.45 U1.49 VT2.S VT3.S | length 74.1
  Top Layer w0.15: v1@14.65,-3.7 14.91,-3.44 VT3.S ; VT2.S 14.77,-5.17 v1(14.85,-5.25)
  Top Layer w0.2: U1.49@3.195,9.192 U1.45 ; U1.49@6.387,7.2 U1.31 7.63,7.2 ; C11.2 11.35,7.68
  Top Layer w0.22: D5.6 D5.5 ; C17.1 -7.7,7.04 -7.498,7.243 D5.8 ; D5.2 v1(-6.998,9.533) ; D8.4 -4.12,12.53 -3.78,12.87 R18.1 ; v1(-3.76,15.08) C33.1@-3.34,15.08 ; D9.9 1.05,13.4 1.52,13.87 D9.8 ; D9.9@1.3,12.87 D9.6 ; U1.49@3.195,9.192 3.035,9.032 3.035,8.408 3.195,8.408 3.195,8 3.199,7.996 3.199,8.16 3.827,8.16 4.155,7.832 4.155,7.204 U1.49@3.991,7.204 ; C10.2 3.732,11.732 3.91,11.91 5.29,11.91 ; C35.1 4.67,14.02 5.29,13.4 5.29,11.91 ; U1.49@4.395,7.2 4.403,7.2 4.563,7.04 5.187,7.04 5.187,7.2 5.603,7.2 5.763,7.04 6.387,7.04 U1.49@6.387,7.2 ; C5.2 6.04,11.23 ; C7.2 6.04,11.23 ; 7.63,7.2 8,7.57 v1(9.06,7.57) ; 9.45,10.65 9.45,10.725 8.265,11.91 6.04,11.91 ; 9.84,1.9 v1(9.84,3.35) ; C4.1 10.3,-11.78 10.42,-11.66 D2.7 ; D1.5 11.05,-1.65 10.59,-2.11 9.95,-2.11 9.19,-1.35 9.19,0.11 8.85,0.45 C1.1 8.85,1.83 8.92,1.9 11.93,1.9 ; v1(12.79,3.35) 12.79,2.76 11.93,1.9 ; C2.1 12.58,1.25 ; v1(14.63,-3.7) v1@14.65,-3.7 ; v1(16.92,-0.27) v1(15.68,-0.27) v1(15.01,-0.27) 14.77,-0.51 v1(14.77,-2.04) 14.24,-2.57 v1(13.19,-2.57) 12.35,-1.73 D1.3 12.35,1.02 12.58,1.25 ; 5.29,11.91 6.04,11.91 ; 6.04,11.23 6.04,11.91 ; 11.93,1.9 12.58,1.25 ; D6.PGND@-13.24,2.5 -13.24,4.314 v1(-13.084,4.47) C22.1 v1(-12.228,4.47) -12.04,4.282 -12.04,2.5 -12.44,2.5 -12.84,2.5 D6.PGND@-13.24,2.5
  Signal Layer 1 w0.22: v1@-13.064,4.47 v1(-13.084,4.47) -12.89,4.276 -12.89,4.244 ; v1(-13.047,3.099) -13.047,4.087 -12.89,4.244 ; v1(-12.25,3.089) -12.25,4.092 -12.434,4.276 ; v1(-12.228,4.47) -12.422,4.276 -12.434,4.276 ; v1(-8.03,10.62) -8.787,10.62 -12.646,6.761 -12.646,4.488 ; -12.89,4.244 -12.646,4.488 ; -12.646,4.488 -12.434,4.276
  Bottom Layer w0.22: v1(13.19,-2.57) R2.2@13.19,-1.76
  other v1: -7.02,-15.28 -6.02,-15.28 -5.02,-15.28 4.98,-15.28 5.98,-15.28 6.98,-15.28 7.04,-14.82 -8.52,-14.28 -7.52,-14.28 -6.52,-14.28 -5.52,-14.28 -1.52,-14.28 -0.52,-14.28 0.48,-14.28 5.48,-14.28 6.48,-14.28 7.48,-14.28 8.48,-14.28 -9.27,-13.57 -10.02,-13.28 -6.02,-13.28 -5.02,-13.28 -2.02,-13.28 -1.02,-13.28 -0.02,-13.28 1.98,-13.28 9.73,-12.95 5.62,-12.87 -6.52,-12.28 -5.52,-12.28 -4.52,-12.28 -2.52,-12.28 -1.52,-12.28 -0.52,-12.28 0.48,-12.28 2.48,-12.28 4.48,-12.28 5.48,-12.28 6.48,-12.28 12.06,-11.83 -12.02,-11.28 -11.02,-11.28 -6.02,-11.28 -5.02,-11.28 -4.02,-11.28 -2.02,-11.28 -1.02,-11.28 -0.02,-11.28 1.98,-11.28 3.98,-11.28 4.98,-11.28 5.98,-11.28 11.98,-11.28 12.67,-11.16 -11.55,-11.13 -6.52,-10.28 -5.52,-10.28 -4.52,-10.28 -2.52,-10.28 -1.52,-10.28 -0.52,-10.28 0.48,-10.28 2.48,-10.28 4.48,-10.28 5.48,-10.28 6.48,-10.28 -13.72,-9.54 -13.02,-9.28 -11.02,-9.28 -10.02,-9.28 -6.02,-9.28 -5.02,-9.28 -4.02,-9.28 -2.02,-9.28 -1.02,-9.28 -0.02,-9.28 1.98,-9.28 3.98,-9.28 4.98,-9.28 5.98,-9.28 -14.52,-8.28 -5.52,-8.28 -4.52,-8.28 -2.52,-8.28 -1.52,-8.28 -0.52,-8.28 0.48,-8.28 2.48,-8.28 4.48,-8.28 5.48,-8.28 6.48,-8.28 -15.02,-7.28 -5.02,-7.28 -4.02,-7.28 -3.02,-7.28 -1.02,-7.28 -0.02,-7.28 1.98,-7.28 3.98,-7.28 4.98,-7.28 5.98,-7.28 -15.52,-6.28 -14.52,-6.28 -9.52,-6.28 -6.52,-6.28 -5.52,-6.28 -3.52,-6.28 -2.52,-6.28 -0.52,-6.28 0.48,-6.28 2.48,-6.28 4.48,-6.28 5.48,-6.28 6.48,-6.28 -16.02,-5.28 -15.02,-5.28 -5.02,-5.28 -3.02,-5.28 -1.02,-5.28 1.98,-5.28 3.98,-5.28 4.98,-5.28 5.98,-5.28 -16.52,-4.28 -14.52,-4.28 -9.52,-4.28 -6.52,-4.28 -5.52,-4.28 -4.52,-4.28 -1.52,-4.28 -0.52,-4.28 2.48,-4.28 4.48,-4.28 5.48,-4.28 6.48,-4.28 11.48,-4.28 13.54,-3.73 -16.32,-3.55 -12.02,-3.28 -1.02,-3.28 -0.02,-3.28 3.98,-3.28 4.98,-3.28 5.98,-3.28 15.64,-2.75 -9.52,-2.28 -6.52,-2.28 -4.52,-2.28 0.48,-2.28 4.48,-2.28 5.48,-2.28 16.936,-1.866 -9.02,-1.28 -4.02,-1.28 1.98,-1.28 -16.59,-1.22 14.77,-1.14 -12.18,-1.02 17.02,-1.01 -6.52,-0.28 -4.52,-0.28 -3.52,-0.28 16.3,-0.27 -12.04,0.1 8.9,0.5 17.02,0.55 -8.02,0.72 -7.02,0.72 -6.02,0.72 -4.02,0.72 -3.02,0.72 -2.02,0.72 14.42,0.75 14.78,1.38 16.92,1.68 -16.52,1.72 -15.52,1.72 -8.52,1.72 -7.52,1.72 -6.52,1.72 15.16,1.95 14.7,1.99 16.14,2.12 13.17,2.24 14.39,2.3 -10.02,2.72 14.37,2.85 14.38,3.39 11.48,3.72 14.35,3.93 14.09,4.39 -15.02,4.72 -11.02,4.72 -9.02,4.72 -8.02,4.72 13.72,4.93 13.34,5.46 -8.52,5.72 -16.05,5.91 12.93,6.01 -15.02,6.72 -10.02,6.72 11.48,7.55 12.01,7.56 -15.09,7.69 -4.52,7.72 -2.52,7.72 11.49,8.31 -8.01,8.36 -10.52,9.72 10.69,9.87 -4.14,10.52 -2.61,10.57 9.65,10.95 9.19,11.38 -10.52,11.72 -8.52,11.72 -7.52,11.72 8.78,11.78 -3.98,12.67 -11.02,12.72 -7.02,12.72 7.11,12.86 6.47,13.31 4.81,13.55 -9.52,13.72 -8.52,13.72 -2.52,13.72 5.02,13.91 3.855,13.945 3.33,14.15 -4.02,14.72 -2.52,15.72 -0.02,16.72 1.98,16.72
  other v5: 10.1,5.77
GSM_DTR: D2.4 D3.6 | length 5.1
  Top Layer w0.22: v1(6.61,-7.21) D3.6 ; v1(9.02,-9.59) D2.4
  Signal Layer 1 w0.22: v1(6.61,-7.21) 6.61,-7.22 8.98,-9.59 v1(9.02,-9.59)
GSM_PWR: R3.2 U1.16 VT1.G | length 4.5
  Top Layer w0.15: VT1.G 5.91,3.06 v1(5.99,3.14)
  Top Layer w0.2: v1(3.195,3.395) U1.16
  Top Layer w0.22: v1(5.99,3.14) 6.04,3.09 6.147,3.09 6.337,2.9 R3.2
  Signal Layer 2 w0.22: v1(3.195,3.395) 3.45,3.14 v1@5.9,3.14
GSM_PWRKEY: D3.39 U1.14 | length 20.3
  Top Layer w0.2: v1(2.4,3.34) U1.14@2.4,3.97
  Top Layer w0.22: D3.39 v1(1.09,-14.03)
  Signal Layer 1 w0.22: v1(1.09,-14.03) 1.09,-1.5 2.81,0.22 2.81,2.04 2.4,2.45 v1(2.4,3.34)
GSM_RESET: C12.2 D3.28 U1.15 | length 19.8
  Top Layer w0.2: U1.15@2.79,3.98 v1(2.79,4.21)
  Top Layer w0.22: D3.28 -6.47,-7.21 -6.03,-6.77 v1(-6.03,-0.69) ; v1(0.1,3.39) C12.2@0.1,3.965 ; U1.15@2.79,3.98 U1.15
  Signal Layer 1 w0.22: v1(-6.03,-0.69) -1.95,3.39 v1(0.1,3.39) 1.82,3.39 2.64,4.21 v1(2.79,4.21)
GSM_RTS: D2.5 D3.3 | length 1.9
  Top Layer w0.22: D3.3 8.54,-10.51 8.96,-10.09 D2.5
GSM_RX: D2.3 D3.2 | length 5.1
  Top Layer w0.22: D3.2 v1(9.03,-11.61) ; v1(9.03,-9.09) D2.3
  Signal Layer 1 w0.22: v1(9.03,-11.61) 9.76,-10.88 9.76,-9.29 9.56,-9.09 v1(9.03,-9.09)
GSM_STATUS: D3.42 U1.12 | length 22.9
  Top Layer w0.2: U1.12 v1(1.57,4.8)
  Top Layer w0.22: v1(4.38,-14.1) 4.38,-15.45 D3.42
  Signal Layer 1 w0.22: v1(1.57,4.8) 1.76,4.61 2.96,4.61 3.21,4.36 3.21,4.05 2.815,3.655 2.815,2.765 3.19,2.39 3.19,-12.91 v1(4.38,-14.1)
GSM_TX: D2.2 D3.1 | length 7.2
  Top Layer w0.22: D3.1 v1(9.04,-12.71) ; v1(9.01,-8.59) D2.2
  Signal Layer 1 w0.22: v1(9.01,-8.59) 9.82,-8.59 10.12,-8.89 10.12,-11.63 v1(9.04,-12.71)
GSM_VDD_EXT: C4.2 D2.1 D2.8 D3.40 | length 18.6
  Top Layer w0.22: D3.40 2.19,-13.76 2.47,-13.48 10.38,-13.48 11.1,-12.76 C4.2 11.1,-11.84 v1(10.92,-11.66) D2.8 ; v1(9.8,-7.52) 10.12,-7.52 10.42,-7.82 D2.1
  Signal Layer 1 w0.22: v1(9.8,-7.52) 10.46,-8.18 10.46,-11.2 v1(10.92,-11.66)
MCU_CTS: D2.10 U1.17 | length 19.5
  Top Layer w0.2: U1.17 v1(3.595,4.345) ; D2.10 v1(12.35,-10.09)
  Signal Layer 1 w0.22: v1(3.595,4.345) 3.595,0.605 11.11,-6.91 11.11,-9.71 11.49,-10.09 v1(12.35,-10.09)
MCU_DTR: D2.11 U1.18 | length 17.9
  Top Layer w0.2: v1(3.995,3.545) U1.18
  Top Layer w0.22: D2.11 v1(12.34,-9.59)
  Signal Layer 1 w0.22: v1(3.995,3.545) 3.995,0.935 11.47,-6.54 11.47,-9.35 11.71,-9.59 v1(12.34,-9.59)
MCU_RX: D2.13 U1.20 | length 16.2
  Top Layer w0.2: v1(4.795,3.555) U1.20
  Top Layer w0.22: D2.13 v1(12.34,-8.59)
  Signal Layer 1 w0.22: v1(4.795,3.555) 4.795,1.278 12.34,-6.267 v1(12.34,-8.59)
MCU_TX: D2.12 U1.19 | length 17.8
  Top Layer w0.2: U1.19 v1(4.395,4.365)
  Top Layer w0.22: D2.12 v1(12.34,-9.09)
  Signal Layer 1 w0.22: v1(4.395,4.365) 4.395,1.105 11.9,-6.4 11.9,-8.87 12.12,-9.09 v1(12.34,-9.09)
NetC2_2: C2.2 D1.1 | length 1.8
  Top Layer w0.22: D1.1 13.65,1.16 C2.2
NetC3_1: C3.1 D1.6 | length 1.9
  Top Layer w0.22: D1.6 10.4,0.76 C3.1
NetC3_2: C3.2 D1.4 P1.1 | length 8.4
  Top Layer w0.22: C3.2 11.7,1.24 D1.4 11.7,-1.763 13.047,-3.11 14.37,-3.11 P1.1
NetC5_1: C5.1 U1.46 | length 3
  Top Layer w0.2: U1.46 2.795,10.545
  Top Layer w0.22: 2.795,10.545 2.89,10.64 4.6,10.64 4.716,10.756 C5.1
NetC6_1: C6.1 D3.34 D3.35 pad.3 VT1.D | length 39.5
  Top Layer w0.15: 5.2,2.44 VT1.D
  Top Layer w0.22: C6.1@-4.85,4.52 C6.1
  Top Layer w0.3: C6.1@-4.85,4.52 -5.28,4.09 -5.28,-2.39 -1.305,-6.365 ; D3.34 -4.41,-13.48 -3.31,-12.38 ; D3.35 -3.31,-12.38 ; 5.2,2.44 5.2,0.14 -1.305,-6.365 ; -3.31,-12.38 -3.31,-8.37 -1.305,-6.365
NetC7_1: C7.1 U1.35 XTAL1.2 | length 3.6
  Top Layer w0.2: U1.35 7.6,8.8
  Top Layer w0.22: C7.1 7.89,10.65 ; 7.6,8.8 7.78,8.98 7.78,10.47 7.96,10.65 XTAL1.2
NetC8_2: C8.2 U1.2 XTAL2.2 | length 2.6
  Top Layer w0.2: 0.05,8.8 U1.2
  Top Layer w0.22: XTAL2.2 -0.3,8.45 0.05,8.8 C8.2
NetC9_1: C9.1 U1.34 XTAL1.1 | length 4.1
  Top Layer w0.2: U1.34 7.67,8.4 7.82,8.55 9.45,8.55
  Top Layer w0.22: XTAL1.1 9.45,8.55 10.5,8.55 C9.1
NetC10_1: C10.1 U1.1 | length 4.4
  Top Layer w0.2: v1(0.74,9.2) U1.1
  Top Layer w0.22: v1(2.45,11.24) C10.1
  Signal Layer 1 w0.22: v1(0.74,9.2) 0.74,10.85 1.13,11.24 v1(2.45,11.24)
NetC11_1: C11.1 U1.33 | length 3.1
  Top Layer w0.2: U1.33 7.762,8
  Top Layer w0.22: 7.762,8 7.912,8.15 9.5,8.15 9.68,7.97 9.75,7.97 C11.1
NetC13_2: C13.2 U1.3 XTAL2.1 | length 4.5
  Top Layer w0.2: XTAL2.1 v1(-0.3,7.32) ; v1(0.66,8.4) U1.3
  Top Layer w0.22: XTAL2.1 -0.3,6 0.08,5.62 C13.2
  Signal Layer 1 w0.2: v1(-0.3,7.32) -0.3,7.76 0.34,8.4 v1(0.66,8.4)
NetC15_2: C15.2 L1.1 U1.30 | length 2
  Top Layer w0.19: U1.30 L1.1@9.22,6.8
NetC20_1: C20.1 C21.1 C23.1 C24.1 C25.1 C26.2 C27.2 C28.2 C29.1 D6.AC1 | length 28.9
  Top Layer w0.22: D6.AC1@-12.44,2.1 -12.04,2.1 -11.81,2.1 -11.57,2.34 -11.57,5.67 ; C20.1@-10.94,5.76 -9.19,4.01 C25.1 C23.1 C21.1
  Top Layer w0.3: C28.2 C27.2 ; C20.1@-10.9,5.72 C20.1@-11.06,5.72 ; C24.1 C24.1@-10.89,7.15 ; C27.2 C27.2@-12.33,7.2 ; C27.2 -11.69,6.35 ; C27.2 C26.2 C26.2@-12.32,5.72 ; C27.2@-12.33,7.2 -11.625,7.905 ; C27.2@-12.33,7.2 -10.92,7.2 -11.625,7.905 ; C26.2@-12.32,5.72 -11.69,6.35 ; C26.2@-12.32,5.72 C20.1@-11.06,5.72 ; -11.69,6.35 C24.1@-10.89,7.15 ; -11.69,6.35 C20.1@-11.06,5.72 ; -11.625,7.905 C29.1 ; -11.625,7.905 -12.36,8.64 C29.1 ; C20.1@-11.06,5.72 -11.04,5.7 C20.1 -10.89,5.73 C24.1@-10.89,7.15 ; C24.1@-10.89,7.15 C29.1
NetC20_2: C20.2 C24.2 C29.2 P2.2 | length 7.2
  Top Layer w0.4: P2.2 -9.95,11.14 -9.26,10.45 C20.2
NetC21_2: C21.2 D6.CLAMP1 | length 1.7
  Top Layer w0.22: D6.CLAMP1 v1(-12.42,0.92)
  Signal Layer 1 w0.22: v1(-12.42,0.92) v1(-10.76,0.92)
NetC22_2: C22.2 D6.RECT R14.1 | length 9.5
  Top Layer w0.22: D6.RECT@-12.84,1.7 -12.83,1.71 v1(-12.64,1.71) -12.45,1.71 D6.RECT@-12.44,1.7
  Signal Layer 1 w0.22: v1(-12.64,1.71) v1(-12.64,3.66)
  Signal Layer 2 w0.22: v1(-15.56,-2.24) -14.58,-2.24 -13.73,-1.39 -13.73,1.91 -13.43,2.21 -12.79,2.21 -12.64,2.06 v1(-12.64,1.71)
NetC23_2: C23.2 D6.COMM1 | length 2.4
  Top Layer w0.22: D6.COMM1 -11.54,0.9 -11.47,0.97 -11.47,1.79 C23.2
NetC25_2: C25.2 D6.BOOT1 | length 2.7
  Top Layer w0.22: v1(-12.05,1.72) -12.05,1.71 D6.BOOT1
  Signal Layer 1 w0.22: v1(-12.05,1.72) -12.05,2.68 v1(-10.81,3.92)
NetC26_1: C26.1 C27.1 C28.1 C30.1 C31.1 C32.1 D6.AC2 P2.1 | length 17.6
  Top Layer w0.22: C32.1 C31.1 C30.1 -16.12,5.02 -15.36,5.78 -14.22,5.78 -13.71,5.27 -13.71,2.36 -13.45,2.1 -13.24,2.1 D6.AC2@-12.84,2.1
  Top Layer w0.4: C26.1 -14.14,9.4 -13.58,9.96 -12.6,9.96 P2.1
NetC30_2: C30.2 D6.BOOT2 | length 2.7
  Signal Layer 1 w0.22: v1(-14.5,3.92) -13.24,2.66 v1(-13.24,1.72)
NetC31_2: C31.2 D6.COMM2 | length 2.6
  Top Layer w0.22: C31.2 -14.52,1.84 -14.39,1.71 -14,1.71 -13.84,1.55 -13.84,0.97 -13.77,0.9 D6.COMM2
NetC32_2: C32.2 D6.CLAMP2 | length 1.7
  Signal Layer 1 w0.22: v1(-14.5,0.9) -14.48,0.92 v1(-12.84,0.92)
NetC34_1: C34.1 D9.5 | length 1
  Top Layer w0.22: C34.1 1.96,11.88 2.09,12.01 2.09,12.36 D9.5
NetD1_2: D1.2 P1.2 | length 6
  Top Layer w0.22: D1.2 13,-1.44 13.28,-1.72 13.98,-1.72 14.27,-1.43 14.27,0.06 15.18,0.97 P1.2
NetD3_32: D3.32 J1.1 pad.1 | length 3.3
  Top Layer w0.219: J1.1@-10.321,-9.969 -8.68,-11.61 D3.32
  Top Layer w0.22: J1.1 J1.1@-10.321,-9.969
NetD6_CHG: D6.CHG R16.1 | length 1.8
  Top Layer w0.22: D6.CHG -11.7,0.5 -10.97,-0.23 R16.1
NetD6_FOD: D6.FOD R13.2 R14.2 R17.2 R19.2 | length 6.1
  Top Layer w0.22: R19.2 -15.985,-0.42 ; R14.2 -15.99,-1.87 -15.99,-0.425 -15.985,-0.42 ; v1(-14.16,-0.42) R13.2 -15.985,-0.42
  Signal Layer 1 w0.22: v1(-14.16,-0.42) -13.76,-0.42 v1(-12.84,0.5)
NetD6_ILIM: D6.ILIM R17.1 | length 6
  Top Layer w0.22: R17.1 -14.16,-1.57 -13.98,-1.75 -11.9,-1.75 -11.69,-1.54 -11.69,-0.55 -11.86,-0.38 -13.17,-0.38 -13.24,-0.31 D6.ILIM
NetD6_TS-CTRL: D6.TS-CTRL R15.2 | length 2.4
  Top Layer w0.22: D6.TS-CTRL -13.51,0.5 -13.6,0.41 -13.6,-0.81 -13.38,-1.03 R15.2@-12.91,-1.03
NetD7_1: D7.1 R16.2 | length 1.2
  Top Layer w0.22: R16.2 D7.1@-9.77,-1.5
NetD8_5: D8.5 R18.2 | length 1.3
  Top Layer w0.22: D8.5 -4.01,13.8 -3.88,13.67 R18.2
NetD9_1: D9.1 L2.1 | length 1.6
  Top Layer w0.25: L2.1 -0.71,14.1 -0.48,13.87 D9.1
NetJ2_1: J2.1 pad.2 R12.2 | length 1.1
  Top Layer w0.19: J2.1@11.31,4.88 R12.2
NetL1_2: L1.2 R11.1 R12.1 | length 1.2
  Top Layer w0.19: L1.2 R12.1
P0.09: U1.11 VT2.G | length 21.1
  Top Layer w0.15: v1(13.94,-4.89) 13.99,-4.89 14.37,-4.51 VT2.G
  Top Layer w0.2: v1(0.75,5.2) U1.11
  Bottom Layer w0.2: v1(0.75,5.2) 0.75,4.993 1.56,4.183 1.56,4.18 2.03,3.71 2.03,3.003 11.663,-6.63 12.84,-6.63 13.94,-5.53 v1(13.94,-4.89)
PIN1: R6.2 U1.37 | length 23.9
  Top Layer w0.2: v1(6.395,9.625) U1.37 ; R6.2 13.1,-9.56 v3(13.48,-9.94)
  Signal Layer 2 w0.2: v1(6.395,9.625) 6.395,9.395 6.68,9.11 6.68,-1.54 12.43,-7.29 12.43,-8.05 12.89,-8.51 12.89,-9.35 v3(13.48,-9.94)
PIN2: U1.38 | length 23.7
  Top Layer w0.2: U1.38 v1(5.995,10.505) ; v3(14.13,-8.8) 14.13,-8.59 v3@14.19,-8.53
  Signal Layer 2 w0.2: v1(5.995,10.505) 6.445,10.505 6.775,10.175 6.775,9.596 8.24,8.131 8.24,5.65 9.29,4.6 9.29,-3.4 13.21,-7.32 13.213,-7.32 13.83,-7.937 13.83,-8.5 v3(14.13,-8.8)
PIN3: R8.2 U1.39 | length 26.5
  Top Layer w0.2: v1(5.595,9.625) U1.39 ; R8.2 14.45,-7.44 v3(14.76,-7.75)
  Signal Layer 2 w0.2: v1(5.595,9.625) 5.595,11.005 5.73,11.14 6.88,11.14 8.6,9.42 8.6,7.1 9.55,6.15 9.55,5.65 10.29,4.91 10.29,2.54 11.43,1.4 11.43,-3.7 12.71,-4.98 12.71,-5.7 v3(14.76,-7.75)
PIN4: U1.40 | length 25.1
  Top Layer w0.2: U1.40 v1(5.195,10.505)
  Signal Layer 2 w0.2: v1(5.195,10.505) 5.195,11.327 5.328,11.46 7.05,11.46 9.52,8.99 9.52,7.01 10.65,5.88 10.65,2.83 11.75,1.73 11.75,-3.54 12.79,-4.58 13.14,-4.58 13.57,-5.01 13.57,-5.043 15.124,-6.598 v3@15.373,-6.598
  other v3: 15.35,-6.6
PIN5: VT2.D | length 5.7
  Top Layer w0.15: VT2.D 15.17,-5.082 15.195,-5.107 15.195,-5.115 15.47,-5.39 v3(15.76,-5.39)
  Signal Layer 1 w0.15: v1(11.673,-5.063) 11.673,-5.169 12.294,-5.79 15.07,-5.79 15.47,-5.39 v3(15.76,-5.39)
PIN6: R4.2 VT3.D | length 4
  Top Layer w0.15: v1(13.74,-4.32) 13.845,-4.215 14.705,-4.215 15.08,-3.84 VT3.D 15.79,-3.84 16.08,-4.13 v3(16.08,-4.25)
  Bottom Layer w0.2: R4.2 12.9,-4.32 v1(13.74,-4.32)
PIN7: R1.2 | length 1.8
  Bottom Layer w0.2: R1.2 14.89,-3.12 15.883,-3.12 15.973,-3.21 16.28,-3.21 v3(16.43,-3.06)
RESET: U1.24 | length 2.7
  Top Layer w0.2: U1.24 v1(7.125,3.975)
  Signal Layer 2 w0.22: v1(7.125,3.975) 7.125,3.745 v4(8.36,2.51)
SIM_CLK: D3.16 D4.6 | length 16.3
  Top Layer w0.22: v1(-11.44,-3.324) D4.6 ; v1(1.06,0.66) D3.16@1.06,2.11
  Signal Layer 1 w0.22: v1(-11.44,-3.324) -2.924,-3.324 v1(1.06,0.66)
SIM_DATA: D3.15 D4.3 | length 19.3
  Top Layer w0.22: v1(-11.44,-8.35) -11.44,-8.65 D4.3@-11.355,-8.735 ; v1(2.19,0.67) D3.15
  Signal Layer 1 w0.22: v1(-11.44,-8.35) -6.83,-8.35 v1(2.19,0.67)
SIM_RST: D3.17 D4.7 | length 16.5
  Top Layer w0.22: v1(-12.71,-3.31) D4.7 ; v1(-0.01,0.68) D3.17
  Signal Layer 1 w0.22: v1(-12.71,-3.31) -12.09,-2.69 -3.38,-2.69 v1(-0.01,0.68)
SIM_VDD: C14.2 D3.18 D4.8 | length 20.5
  Top Layer w0.22: v1(-15.51,-4.32) -15.51,-3.56 -14.935,-2.985 D4.8@-13.895,-2.985 ; v1@-1.11,0.72 D3.18
  Signal Layer 1 w0.22: v1(-15.51,-4.32) -13.02,-1.83 -3.66,-1.83 v1@-1.11,0.72
  other v1: -1.11,0.68
SWDCLK: U1.25 | length 1.8
  Top Layer w0.22: U1.25 7.52,4.8 7.63,4.69 7.63,4.27 8.25,3.65 v4(8.25,3.64)
SWDIO: U1.26 | length 1.4
  Top Layer w0.2: U1.26 7.72,5.2
  Top Layer w0.22: 7.72,5.2 v4(8.36,4.56)
VBAT: C35.2 D8.1 D9.2 D9.7 P3.1 | length 17.6
  Top Layer w0.25: P3.1 0.06,14.54 2.47,14.54 2.76,14.25 2.76,13.72 v1(2.41,13.37) ; v1(-0.46,13.37) D9.2 ; D9.7 v1(2.41,13.37) ; C35.2 3.06,12.72 v1(2.41,13.37)
  Top Layer w0.4: D8.1 -7.12,15.07 cw(c-3.378,11.328) -3.378,16.62 -2.784,16.62 cw(c-2.784,14.776) P3.1@-1.48,16.08
  Signal Layer 1 w0.25: v1(-0.46,13.37) v1(2.41,13.37)
pads on no net: D1.14 D2.6 D2.9 D2.15 D3.4 D3.5 D3.7 D3.9 D3.10 D3.11 D3.12 D3.14 D3.20 D3.22 D3.23 D3.24 D3.25 D3.26 D3.29 D3.38 D3.41 D4.2 D4.4 D4.5 D6.AD-EN D6.EN1 D6.EN2 D8.2 D8.3 D8.7 D9.3 U1.32 U1.44 U1.47 XTAL1.GND
copper on no net: | length 330.5
  Top Layer w0.08: 17.515,0 ccw(c0,0) 17.515,0
  Signal Layer 1 w0.08: 17.564,0 ccw(c0,0) 17.564,0
  Bottom Layer w0.254: 17.514,0 ccw(c0,0) 17.514,0
  other v1: 8.19,9.05 -6.11,13.05 -6.1,13.8 -6.09,14.52
  other v2: 2.395,5.2 3.595,5.2 4.795,5.2 5.995,5.2 2.395,6.4 3.595,6.4 4.795,6.4 5.995,6.4 2.395,7.6 3.595,7.6 4.795,7.6 5.995,7.6 2.395,8.8 3.595,8.8 4.795,8.8 5.995,8.8

## Polygon pours and split planes (outlines as drawn)
GND on Bottom Layer "GND" (solid, remove dead copper, pour order 22): -19.71,19.53 -19.64,19.46 19.63,19.46 19.63,-19.34 19.7,-19.41 19.64,-19.47 -19.71,-19.47
no net on Bottom Layer "GND" (solid, remove dead copper, pour order 6): -25.1,20.8
GND on Signal Layer 1 "GND" (solid, remove dead copper, pour order 24): -19.91,18.38 20.08,18.38 19.83,18.13 19.83,-22.37 -19.99,-22.37
GND on Top Layer "GND" (solid, remove dead copper, pour order 26): -19.81,18.39 -19.66,18.24 -19.66,-19.52 19.53,-19.52 19.53,18.31

## Other copper
Top Layer:
  pour cut-out: 2.69,17.3 2.69,14.32 4.42,14.32 6.515,13.475 10,11.01 14.255,4.485 14.612,3.813 14.6,2.24 18.08,2.24 18.09,2.23 18.1,2.24 18.1,17.27
Signal Layer 1:
  pour cut-out: 2.6,17.4 2.6,14.5 2.8,14.3 4.6,14.3 6.5,13.5 10,11 14.6,4 14.6,2.2 17.8,2.2 18,2.4 17.8,2.6 17.8,16.6
Bottom Layer:
  pour cut-out: 2.7,17.3 2.6,17.2 2.6,14.3 4.5,14.3 6.5,13.5 10,10.9 14.6,4 14.6,2.3 18,2.3 18.1,2.4 18.1,17.3

## Silkscreen, mask and mechanical layers (free items; w line width, h text height)
Mechanical 1:
  circle w0.254: c0,0 r17.5